# Altium PCB electrodes_interface_pcb.PcbDoc (part 1 of 4)
Units mm, origin at the board's own origin, x right, y up, seen from the top; angles counter-clockwise.
Board outline 433.27 x 43.31 mm, 4 copper layers (Top Layer, Signal Layer 1, Signal Layer 2, Bottom Layer), stack 1.308 mm thick; 42 components, 52 nets, 166 pads, 143 vias.
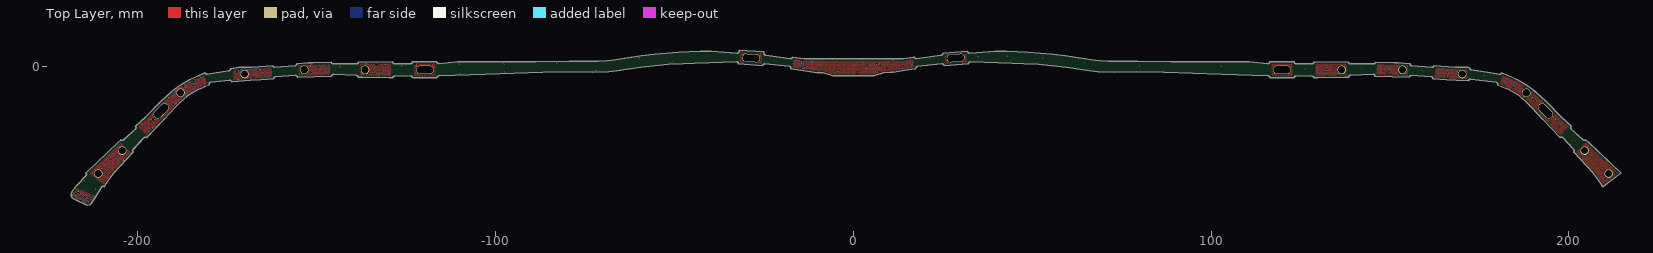
[diagram p0: Top Layer view]
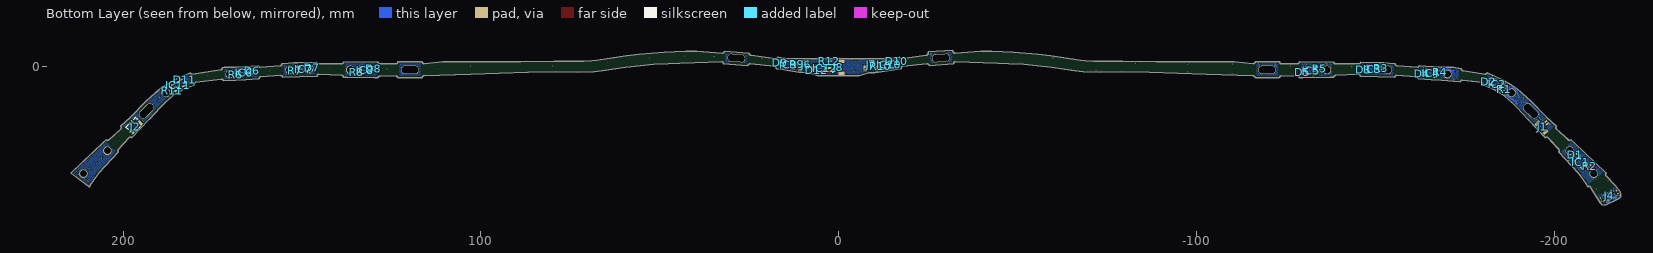
[diagram p1: Bottom Layer view, seen from below]
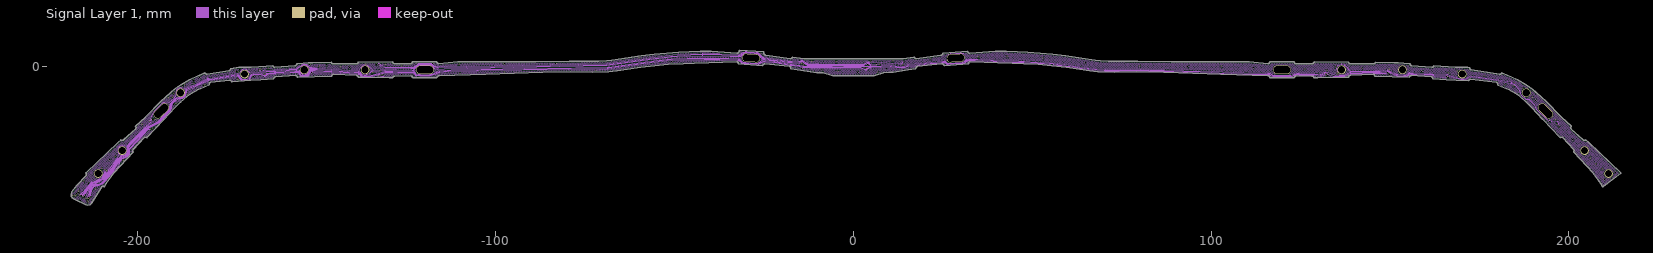
[diagram p2: Signal Layer 1]
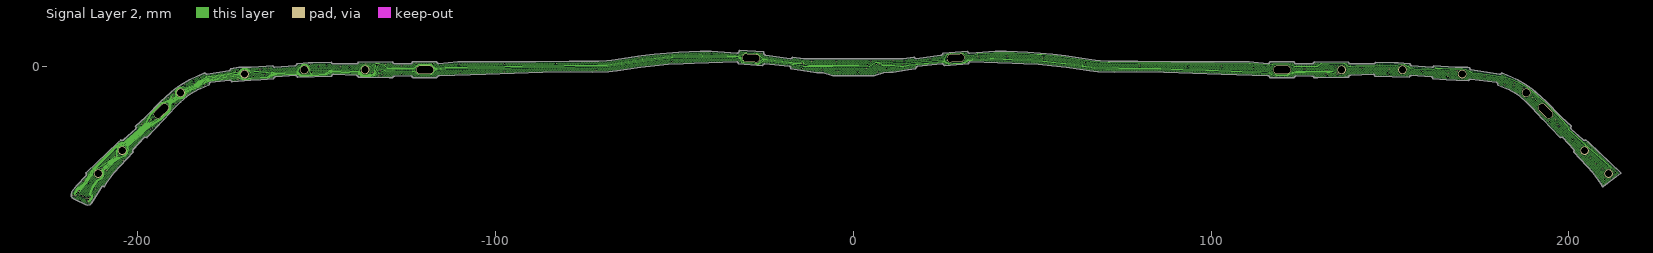
[diagram p3: Signal Layer 2]
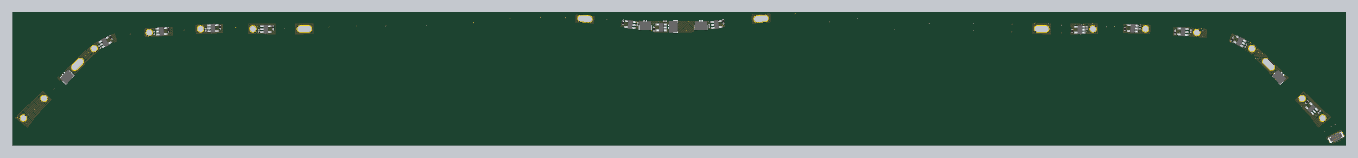
[diagram p7: 3D render of the assembled board from below, using the file's embedded part models]

## Layer stack, top to bottom
Top Solder: solder mask 0.0125, FC-001, Dk 4
Top Solder: solder mask 0.0102, Solder Resist, Dk 3.5
Top Layer: signal copper 0.0356
Dielectric 1: core 0.254, FR-4, Dk 4.2
Adhesive 3: prepreg 0.015, PP-006, Dk 4.1
Signal Layer 1: signal copper 0.0356
Adhesive 1: prepreg 0.013, PP-006, Dk 4.1
Polyimide: core 0.025, Core-009, Dk 4.5
Adhesive 2: prepreg 0.013, PP-006, Dk 4.1
Stiffener 2: core 0.213, Core-009, Dk 4.5
Stiffener 1: core 0.213, Core-009, Dk 4.5
Signal Layer 2: signal copper 0.0356
Adhesive 4: prepreg 0.015, PP-006, Dk 4.1
Dielectric 2: core 0.254, Dk 4.2
Bottom Layer: signal copper 0.0356
Bottom Coverlay: solder mask 0.0102, Solder Resist, Dk 3.5
Bottom Coverlay: solder mask 0.0125, FC-001, Dk 4
Stiffener 3: core 0.1504, Core-009, Dk 4.5

## Board outline
424 vertices, not listed, extent -218.704,-38.633 214.568,4.678
board region "Layer Stack Region 18": 17.469,-0.445 17.467,-0.42 17.467,-0.369 17.471,-0.319 17.479,-0.269 17.485,-0.245 17.08,2.59 17.067,2.61 17.044,2.651 17.025,2.693 17.009,2.737 17.002,2.76 13.87,2.244 -13.87,2.244 -17.002,2.76 -17.009,2.737 -17.025,2.693 -17.044,2.651 -17.067,2.61 -17.08,2.59 -17.485,-0.245 -17.481,-0.262 -17.474,-0.298 -17.469,-0.333 -17.467,-0.369 -17.466,-0.387 -17.469,-0.445 -13.825,-1.032 -10.171,-1.574 -10.12,-1.581 -8.483,-1.574 -8.447,-1.581 -6.199,-2.347 -5.753,-2.421 5.753,-2.421 6.199,-2.347 8.447,-1.581 8.483,-1.574 10.216,-1.54 11.106,-1.456 15.259,-0.745
board region "Layer Stack Region 31": 188.103,-9.811 189.664,-11.36 192.743,-14.647 197.551,-19.758 197.572,-19.739 197.616,-19.704 197.663,-19.674 197.713,-19.648 197.739,-19.637 200.551,-16.849 200.563,-16.815 200.595,-16.749 200.634,-16.688 200.682,-16.633 200.708,-16.608 197.915,-14.036 197.912,-14.033 193.441,-9.438 193.439,-9.435 192.498,-8.611 190.777,-7.102 189.924,-6.317 187.999,-4.969 187.996,-4.966 185.6,-3.569 185.228,-3.37 181.536,-1.749 181.531,-1.747 181.267,-1.686 181.255,-1.71 181.23,-1.755 181.2,-1.798 181.167,-1.838 181.148,-1.856 180.135,-4.827 180.135,-4.849 180.135,-4.874 180.13,-4.923 180.121,-4.971 180.108,-5.019 180.1,-5.042 181.346,-5.604 183.387,-6.426 183.406,-6.435 185.064,-7.382 185.075,-7.389 186.298,-8.23 186.313,-8.241
board region "Layer Stack Region 4": -189.656,-11.352 -188.104,-9.811 -186.313,-8.241 -186.298,-8.23 -185.075,-7.389 -185.064,-7.382 -183.406,-6.435 -183.387,-6.426 -181.346,-5.604 -180.1,-5.042 -180.109,-5.016 -180.123,-4.963 -180.132,-4.909 -180.135,-4.854 -180.135,-4.827 -181.148,-1.856 -181.167,-1.838 -181.2,-1.798 -181.23,-1.755 -181.255,-1.71 -181.267,-1.686 -181.531,-1.747 -181.536,-1.749 -185.228,-3.37 -185.6,-3.569 -187.996,-4.966 -187.999,-4.969 -189.924,-6.317 -190.777,-7.102 -192.467,-8.583 -193.439,-9.435 -193.441,-9.438 -197.912,-14.033 -197.915,-14.036 -200.708,-16.608 -200.682,-16.633 -200.634,-16.688 -200.595,-16.749 -200.563,-16.815 -200.551,-16.849 -197.739,-19.637 -197.713,-19.648 -197.663,-19.674 -197.616,-19.704 -197.572,-19.739 -197.551,-19.758 -192.743,-14.647
board region "Layer Stack Region 2": -206.733,-29.586 -201.349,-23.764 -201.361,-23.748 -201.383,-23.715 -201.402,-23.681 -201.42,-23.646 -201.427,-23.627 -204.596,-20.519 -204.622,-20.508 -204.672,-20.481 -204.72,-20.449 -204.763,-20.413 -204.784,-20.393 -205.566,-21.088 -214.568,-29.63 -214.551,-29.647 -214.518,-29.682 -214.489,-29.719 -214.464,-29.759 -214.452,-29.78 -209.701,-33.389 -209.667,-33.397 -209.601,-33.42 -209.538,-33.451 -209.479,-33.49 -209.452,-33.512 -208.946,-32.629 -208.937,-32.616 -206.744,-29.6
board region "Default Layer Stack Region": 208.946,-32.629 209.452,-33.512 209.479,-33.49 209.538,-33.451 209.601,-33.42 209.667,-33.397 209.701,-33.389 214.452,-29.78 214.464,-29.759 214.489,-29.719 214.518,-29.682 214.551,-29.647 214.568,-29.63 205.566,-21.088 204.784,-20.393 204.763,-20.413 204.72,-20.449 204.672,-20.481 204.622,-20.508 204.596,-20.519 201.427,-23.627 201.42,-23.646 201.402,-23.681 201.383,-23.715 201.361,-23.748 201.349,-23.764 206.733,-29.586 206.744,-29.6 208.937,-32.616
board region "Layer Stack Region 8": -165.703,-3.595 -162.006,-3.304 -162.008,-3.273 -162.007,-3.21 -161.998,-3.148 -161.983,-3.087 -161.973,-3.057 -162.222,0.167 -162.235,0.19 -162.257,0.236 -162.275,0.284 -162.288,0.333 -162.292,0.358 -164.17,0.225 -164.172,0.225 -168.321,-0.025 -168.324,-0.025 -171.768,-0.15 -174.001,-0.445 -173.743,-4.179 -168.554,-3.75
board region "Layer Stack Region 12": -138.474,-2.669 -138.464,-2.691 -138.446,-2.736 -138.433,-2.782 -138.424,-2.829 -138.421,-2.853 -137.374,-2.925 -137.372,-2.925 -129.775,-3.025 -128.767,-3.001 -128.763,-2.983 -128.755,-2.949 -128.745,-2.915 -128.733,-2.882 -128.726,-2.866 -128.752,1.222 -128.761,1.243 -128.777,1.286 -128.79,1.331 -128.799,1.376 -128.802,1.399 -138.393,1.375 -138.396,1.348 -138.404,1.294 -138.418,1.241 -138.437,1.19 -138.449,1.165
board region "Layer Stack Region 22": 138.421,-2.853 138.424,-2.829 138.433,-2.782 138.446,-2.736 138.464,-2.691 138.473,-2.669 138.474,-2.669 138.449,1.165 138.437,1.19 138.418,1.241 138.404,1.294 138.396,1.348 138.393,1.375 128.802,1.399 128.799,1.376 128.79,1.331 128.777,1.286 128.761,1.243 128.752,1.222 128.726,-2.866 128.733,-2.882 128.745,-2.915 128.755,-2.949 128.763,-2.983 128.767,-3.001 129.775,-3.025 137.372,-2.925 137.374,-2.925
board region "Layer Stack Region 10": -155.66,0.712 -155.471,-2.688 -155.46,-2.713 -155.44,-2.765 -155.425,-2.818 -155.415,-2.872 -155.413,-2.9 -145.814,-2.59 -145.814,-2.563 -145.809,-2.509 -145.799,-2.455 -145.783,-2.402 -145.774,-2.377 -145.869,1.132 -145.878,1.152 -145.895,1.192 -145.909,1.234 -145.919,1.277 -145.923,1.298 -151.148,1.15 -151.149,1.15 -152.372,1.125 -152.374,1.125 -155.371,0.95 -155.642,0.927 -155.638,0.866 -155.639,0.846 -155.642,0.807 -155.647,0.769 -155.655,0.731
board region "Layer Stack Region 26": 145.814,-2.59 155.413,-2.9 155.415,-2.872 155.425,-2.818 155.44,-2.765 155.46,-2.713 155.471,-2.688 155.66,0.712 155.653,0.738 155.643,0.792 155.639,0.846 155.64,0.9 155.642,0.927 155.37,0.95 152.374,1.125 152.372,1.125 151.149,1.15 151.148,1.15 145.923,1.298 145.919,1.277 145.909,1.234 145.895,1.192 145.878,1.152 145.869,1.132 145.774,-2.377 145.783,-2.402 145.798,-2.453 145.809,-2.505 145.814,-2.558 145.814,-2.585
board region "Layer Stack Region 27": 172.048,-3.709 172.283,-0.438 172.273,-0.41 172.257,-0.351 172.248,-0.292 172.246,-0.232 172.247,-0.202 171.768,-0.15 168.324,-0.025 168.321,-0.025 164.172,0.225 164.17,0.225 162.292,0.358 162.288,0.333 162.275,0.284 162.257,0.236 162.235,0.19 162.222,0.167 161.973,-3.057 161.981,-3.081 161.994,-3.129 162.003,-3.178 162.008,-3.227 162.008,-3.252 162.009,-3.252 162.006,-3.304 165.703,-3.595 168.554,-3.75 171.987,-3.903 171.991,-3.878 172.001,-3.828 172.017,-3.779 172.036,-3.732
board region "Layer Stack Region 23": 123.249,-2.999 123.252,-2.975 123.26,-2.926 123.273,-2.879 123.29,-2.833 123.3,-2.81 123.3,1.208 123.291,1.23 123.276,1.275 123.265,1.32 123.258,1.367 123.255,1.39 116.452,1.424 116.449,1.402 116.439,1.358 116.426,1.314 116.41,1.272 116.4,1.252 116.4,-2.819 116.408,-2.837 116.422,-2.874 116.432,-2.913 116.441,-2.951 116.444,-2.971
board region "Layer Stack Region 14": -123.249,-2.999 -116.444,-2.971 -116.441,-2.951 -116.432,-2.913 -116.422,-2.874 -116.408,-2.837 -116.4,-2.819 -116.4,1.252 -116.41,1.272 -116.426,1.314 -116.439,1.358 -116.449,1.402 -116.452,1.424 -123.255,1.39 -123.258,1.367 -123.265,1.32 -123.276,1.275 -123.291,1.23 -123.3,1.208 -123.3,-2.81 -123.29,-2.833 -123.273,-2.879 -123.26,-2.926 -123.252,-2.975
board region "Layer Stack Region 16": -32.177,0.897 -25.342,0.385 -25.338,0.408 -25.327,0.455 -25.312,0.5 -25.294,0.544 -25.283,0.565 -24.997,3.651 -25.014,3.717 -25.039,3.85 -25.054,3.984 -25.058,4.12 -25.056,4.188 -31.898,4.678 -31.905,4.604 -31.929,4.458 -31.968,4.316 -32.021,4.177 -32.052,4.11 -32.208,1.167 -32.2,1.143 -32.186,1.095 -32.177,1.046 -32.173,0.996 -32.172,0.971
board region "Layer Stack Region 20": 24.997,3.651 25.283,0.565 25.294,0.544 25.312,0.5 25.327,0.455 25.338,0.408 25.342,0.385 32.177,0.897 32.174,0.931 32.173,1 32.181,1.068 32.197,1.134 32.208,1.167 32.052,4.11 32.04,4.135 32.019,4.187 32.004,4.24 31.994,4.295 31.991,4.323 25.027,3.825 25.026,3.803 25.022,3.759 25.015,3.715 25.004,3.672
board region "Layer Stack Region 1": -212.884,-37.975 -212.876,-37.965 -211.561,-35.8 -217.044,-33.057 -217.045,-33.058 -218.554,-34.999 -218.563,-35.018 -218.704,-35.602 -218.704,-35.622 -218.611,-36.207 -218.604,-36.226 -218.413,-36.532 -217.788,-36.97 -217.764,-36.975 -214.495,-38.522 -214.49,-38.523 -214.047,-38.633 -213.465,-38.526 -213.44,-38.513
board region "Layer Stack Region 21": 102.777,-2.098 115.841,-2.498 115.927,-2.496 116.095,-2.531 116.243,-2.617 116.359,-2.744 116.4,-2.819 116.4,1.252 116.36,1.183 116.253,1.067 116.117,0.986 115.964,0.947 115.884,0.945 115.882,0.945 110.622,1.425 88.925,1.5 88.892,1.512 79.425,1.55 79.424,1.55 71.201,1.625 71.196,1.625 69.003,1.724 68.988,1.726 67.593,1.925 67.592,1.925 63.842,2.475 59.294,3.175 59.292,3.175 55.696,3.575 55.694,3.575 48.798,4.15 48.796,4.15 45.848,4.275 42.749,4.375 42.748,4.375 39.728,4.45 32.545,3.815 32.541,3.814 32.466,3.819 32.322,3.86 32.194,3.937 32.091,4.046 32.052,4.11 32.208,1.167 32.236,1.228 32.313,1.338 32.414,1.427 32.534,1.488 32.598,1.507 32.612,1.508 40.404,1.2 44.451,1.075 44.453,1.075 47.576,0.95 47.579,0.95 51.726,0.7 51.732,0.7 55.504,0.35 55.506,0.35 59.478,-0.05 59.485,-0.051 63.256,-0.625 63.26,-0.626 66.105,-1.125 66.109,-1.125 68.377,-1.35 68.38,-1.35 72.899,-1.475 72.902,-1.475 79.219,-1.369 79.221,-1.369 86.85,-1.494 86.87,-1.498
board region "Layer Stack Region 15": -32.612,1.508 -32.598,1.507 -32.534,1.488 -32.414,1.427 -32.313,1.338 -32.236,1.228 -32.208,1.167 -32.052,4.11 -32.091,4.046 -32.194,3.937 -32.322,3.86 -32.466,3.819 -32.541,3.814 -32.545,3.815 -39.728,4.45 -42.748,4.375 -42.749,4.375 -45.848,4.275 -48.796,4.15 -48.798,4.15 -55.694,3.575 -55.696,3.575 -59.292,3.175 -59.294,3.175 -63.842,2.475 -67.592,1.925 -67.593,1.925 -68.988,1.726 -69.003,1.724 -71.196,1.625 -71.201,1.625 -79.424,1.55 -79.425,1.55 -88.892,1.512 -88.925,1.5 -110.622,1.425 -115.882,0.945 -115.884,0.945 -115.964,0.947 -116.117,0.986 -116.253,1.067 -116.36,1.183 -116.4,1.252 -116.4,-2.819 -116.359,-2.744 -116.243,-2.617 -116.095,-2.531 -115.927,-2.496 -115.841,-2.498 -102.777,-2.098 -86.87,-1.498 -86.85,-1.494 -79.221,-1.369 -79.219,-1.369 -72.902,-1.475 -72.899,-1.475 -68.38,-1.35 -68.377,-1.35 -66.109,-1.125 -66.105,-1.125 -63.26,-0.626 -63.256,-0.625 -59.485,-0.051 -59.478,-0.05 -55.506,0.35 -55.504,0.35 -51.732,0.7 -51.726,0.7 -47.579,0.95 -47.576,0.95 -44.453,1.075 -44.451,1.075 -40.404,1.2
board region "Layer Stack Region 11": -145.284,-2.035 -138.96,-2.358 -138.884,-2.365 -138.739,-2.408 -138.612,-2.49 -138.511,-2.603 -138.474,-2.669 -138.449,1.165 -138.487,1.099 -138.59,0.985 -138.72,0.905 -138.867,0.863 -138.943,0.857 -145.359,0.834 -145.436,0.837 -145.587,0.874 -145.721,0.953 -145.828,1.065 -145.869,1.132 -145.774,-2.377 -145.739,-2.307 -145.642,-2.185 -145.514,-2.095 -145.366,-2.044 -145.289,-2.035
board region "Layer Stack Region 24": 145.289,-2.035 145.366,-2.044 145.514,-2.095 145.642,-2.185 145.739,-2.307 145.774,-2.377 145.869,1.132 145.828,1.065 145.721,0.953 145.587,0.874 145.436,0.837 145.359,0.834 138.943,0.857 138.867,0.863 138.72,0.905 138.59,0.985 138.487,1.099 138.449,1.165 138.473,-2.669 138.511,-2.603 138.612,-2.49 138.739,-2.408 138.884,-2.365 138.96,-2.358 145.284,-2.035
board region "Layer Stack Region 29": 179.725,-4.317 179.732,-4.319 179.813,-4.348 179.957,-4.444 180.064,-4.579 180.124,-4.741 180.135,-4.827 181.148,-1.856 181.092,-1.904 180.964,-1.976 180.821,-2.01 180.674,-2.006 180.602,-1.989 172.713,-0.783 172.712,-0.783 172.642,-0.767 172.51,-0.71 172.398,-0.619 172.313,-0.503 172.283,-0.438 172.048,-3.709 172.086,-3.646 172.187,-3.539 172.312,-3.462 172.453,-3.421 172.526,-3.415 172.533,-3.416
board region "Layer Stack Region 35": -209.812,-33.378 -209.798,-33.378 -209.77,-33.379 -209.743,-33.382 -209.715,-33.386 -209.701,-33.389 -214.452,-29.78 -214.437,-29.81 -214.413,-29.872 -214.397,-29.937 -214.389,-30.004 -214.388,-30.037 -214.39,-30.082 -214.405,-30.172 -214.435,-30.258 -214.478,-30.338 -214.504,-30.375 -214.534,-30.393 -217.044,-33.057 -212.659,-35.251 -211.561,-35.8 -210.175,-33.519 -210.144,-33.489 -210.107,-33.464 -210.029,-33.422 -209.944,-33.394 -209.857,-33.379
board region "Layer Stack Region 3": -198.275,-19.718 -198.269,-19.712 -198.21,-19.674 -198.082,-19.62 -197.944,-19.601 -197.806,-19.617 -197.739,-19.637 -200.551,-16.849 -200.545,-16.87 -200.535,-16.912 -200.528,-16.954 -200.524,-16.997 -200.524,-17.019 -200.526,-17.064 -200.541,-17.154 -200.57,-17.24 -200.613,-17.32 -200.64,-17.357 -200.646,-17.363 -203.976,-20.374 -204.037,-20.433 -204.182,-20.52 -204.347,-20.558 -204.515,-20.545 -204.596,-20.519 -201.427,-23.627 -201.452,-23.549 -201.465,-23.385 -201.428,-23.224 -201.346,-23.082 -201.29,-23.021
board region "Layer Stack Region 33": 198.275,-19.718 201.29,-23.021 201.33,-23.062 201.395,-23.154 201.44,-23.257 201.463,-23.368 201.466,-23.424 201.465,-23.45 201.461,-23.502 201.451,-23.553 201.436,-23.603 201.427,-23.627 204.596,-20.519 204.515,-20.545 204.347,-20.558 204.182,-20.52 204.037,-20.433 203.976,-20.374 200.646,-17.363 200.64,-17.357 200.602,-17.302 200.548,-17.179 200.525,-17.047 200.534,-16.914 200.551,-16.849 197.739,-19.637 197.806,-19.617 197.944,-19.601 198.082,-19.62 198.21,-19.674 198.269,-19.712
board region "Layer Stack Region 25": 128.224,-2.54 128.302,-2.546 128.454,-2.591 128.586,-2.677 128.689,-2.796 128.726,-2.866 128.752,1.222 128.712,1.152 128.605,1.033 128.468,0.951 128.314,0.911 128.234,0.908 123.805,0.878 123.726,0.884 123.573,0.929 123.44,1.016 123.337,1.138 123.3,1.208 123.3,-2.81 123.337,-2.743 123.438,-2.628 123.567,-2.545 123.713,-2.501 123.789,-2.495 123.791,-2.495 128.166,-2.543 128.173,-2.542 128.187,-2.541 128.202,-2.541 128.216,-2.54
board region "Layer Stack Region 13": -123.791,-2.495 -123.789,-2.495 -123.713,-2.501 -123.567,-2.545 -123.438,-2.628 -123.337,-2.743 -123.3,-2.81 -123.3,1.208 -123.337,1.138 -123.44,1.016 -123.573,0.929 -123.726,0.884 -123.805,0.878 -128.234,0.908 -128.314,0.911 -128.468,0.951 -128.605,1.033 -128.712,1.152 -128.752,1.222 -128.726,-2.866 -128.685,-2.79 -128.57,-2.663 -128.42,-2.577 -128.252,-2.541 -128.166,-2.543
board region "Layer Stack Region 19": 17.899,0.15 24.736,0.854 24.818,0.857 24.979,0.826 25.123,0.75 25.239,0.634 25.283,0.565 24.997,3.651 24.962,3.571 24.857,3.432 24.714,3.333 24.546,3.283 24.459,3.279 17.603,2.355 17.602,2.354 17.527,2.35 17.378,2.373 17.242,2.435 17.127,2.531 17.08,2.59 17.485,-0.245 17.509,-0.175 17.584,-0.047 17.691,0.057 17.821,0.127 17.892,0.149
board region "Layer Stack Region 17": -17.899,0.15 -17.892,0.149 -17.821,0.127 -17.691,0.057 -17.584,-0.047 -17.509,-0.175 -17.485,-0.245 -17.08,2.59 -17.127,2.531 -17.242,2.435 -17.378,2.373 -17.527,2.35 -17.602,2.354 -17.603,2.355 -24.459,3.279 -24.546,3.283 -24.714,3.333 -24.857,3.432 -24.962,3.571 -24.997,3.651 -25.283,0.565 -25.239,0.634 -25.123,0.75 -24.979,0.826 -24.818,0.857 -24.736,0.854
board region "Layer Stack Region 9": -155.957,-2.388 -155.954,-2.388 -155.879,-2.394 -155.737,-2.436 -155.61,-2.515 -155.51,-2.624 -155.471,-2.688 -155.66,0.712 -155.687,0.639 -155.771,0.507 -155.888,0.405 -156.029,0.339 -156.105,0.322 -156.109,0.321 -161.726,-0.101 -161.728,-0.101 -161.802,-0.099 -161.945,-0.066 -162.074,0.004 -162.181,0.107 -162.222,0.167 -161.973,-3.057 -161.942,-2.989 -161.853,-2.869 -161.737,-2.777 -161.599,-2.72 -161.526,-2.706 -161.523,-2.706
board region "Layer Stack Region 30": 155.471,-2.688 155.51,-2.624 155.61,-2.515 155.737,-2.436 155.879,-2.394 155.954,-2.388 155.957,-2.388 161.523,-2.706 161.526,-2.706 161.599,-2.72 161.737,-2.777 161.853,-2.869 161.942,-2.989 161.973,-3.057 162.222,0.167 162.181,0.107 162.074,0.004 161.945,-0.066 161.802,-0.099 161.728,-0.101 161.726,-0.101 156.109,0.321 156.105,0.322 156.029,0.339 155.888,0.405 155.771,0.507 155.687,0.639 155.66,0.712
board region "Layer Stack Region 7": -179.725,-4.317 -174.412,-3.651 -174.303,-3.674 -174.097,-3.761 -173.922,-3.899 -173.79,-4.078 -173.743,-4.179 -174.001,-0.445 -174.036,-0.553 -174.147,-0.752 -174.306,-0.915 -174.501,-1.032 -174.609,-1.07 -180.602,-1.989 -180.674,-2.006 -180.821,-2.01 -180.964,-1.976 -181.092,-1.904 -181.148,-1.856 -180.135,-4.827 -180.124,-4.741 -180.064,-4.579 -179.957,-4.444 -179.813,-4.348 -179.732,-4.319

## Design rules (kind name [scope] priority, off if disabled: settings)
BoardOutlineClearance [OnLayer('Bottom Layer')] p1: gap=0.41 ignorepadtopadclearanceinfootprint=FALSE except(0: Arc-SplitContinuation Poly-SplitContinuation; 0.2: Track-OutlineEdge Track-CutoutEdge SMDPad-OutlineEdge SMDPad-CutoutEdge THPad-OutlineEdge THPad-CutoutEdge Via-OutlineEdge Via-CutoutEdge)
BoardOutlineClearance BoardOutlineClearance_2 [OnLayer('Top Layer')] p2: gap=0.41 ignorepadtopadclearanceinfootprint=FALSE except(0: Arc-SplitContinuation Poly-SplitContinuation; 0.2: Arc-OutlineEdge Arc-CutoutEdge Track-OutlineEdge Track-CutoutEdge SMDPad-OutlineEdge SMDPad-CutoutEdge THPad-OutlineEdge THPad-CutoutEdge Via-OutlineEdge Via-CutoutEdge)
BoardOutlineClearance BoardOutlineClearance_1 [All] p3: gap=0.2 ignorepadtopadclearanceinfootprint=FALSE except(0: Arc-SplitContinuation Track-SplitContinuation Poly-SplitContinuation)
Clearance [All] p1: gap=0.075 ignorepadtopadclearanceinfootprint=FALSE
ComponentClearance [All] p1: gap=0.1 collisioncheckmode=3 verticalgap=0.254 showdistances=FALSE
DiffPairsRouting [All] p1: maxlimit=0.254 minlimit=0.254 mostfreqgap=0.254 toplayer_minwidth=0.381 toplayer_maxwidth=0.381 toplayer_prefwidth=0.381 midlayer1_minwidth=0.381 midlayer1_maxwidth=0.381 midlayer1_prefwidth=0.381 midlayer2_minwidth=0.381 midlayer2_maxwidth=0.381 midlayer2_prefwidth=0.381 bottomlayer_minwidth=0.381 bottomlayer_maxwidth=0.381 bottomlayer_prefwidth=0.381 substack1={2ACF0EFB-B757-4DC5-973B-DD2F7F80F3FB} toplayer_{2acf0efb-b757-4dc5-973b-dd2f7f80f3fb}_minwidth=0.381 toplayer_{2acf0efb-b757-4dc5-973b-dd2f7f80f3fb}_maxwidth=0.381 toplayer_{2acf0efb-b757-4dc5-973b-dd2f7f80f3fb}_prefwidth=0.381 midlayer1_{2acf0efb-b757-4dc5-973b-dd2f7f80f3fb}_minwidth=0.381 midlayer1_{2acf0efb-b757-4dc5-973b-dd2f7f80f3fb}_maxwidth=0.381 midlayer1_{2acf0efb-b757-4dc5-973b-dd2f7f80f3fb}_prefwidth=0.381 midlayer2_{2acf0efb-b757-4dc5-973b-dd2f7f80f3fb}_minwidth=0.381 midlayer2_{2acf0efb-b757-4dc5-973b-dd2f7f80f3fb}_maxwidth=0.381 midlayer2_{2acf0efb-b757-4dc5-973b-dd2f7f80f3fb}_prefwidth=0.381 bottomlayer_{2acf0efb-b757-4dc5-973b-dd2f7f80f3fb}_minwidth=0.381 bottomlayer_{2acf0efb-b757-4dc5-973b-dd2f7f80f3fb}_maxwidth=0.381 bottomlayer_{2acf0efb-b757-4dc5-973b-dd2f7f80f3fb}_prefwidth=0.381 maxuncoupledlength=12.7
MinimumAnnularRing [All] p1: minimumring=0.15
MinimumSolderMaskSliver [All] p1: minsoldermaskwidth=0.1
PolygonConnect [All] p1: connectstyle=Relief reliefconductorwidth=0.254 reliefentries=4 polygonreliefangle="90 Angle" airgapwidth=0.254
RoutingVias [All] p1: holewidth=0.2 width=0.4 viastyle="Through Hole" minholewidth=0.2 minwidth=0.4 maxholewidth=0.2 maxwidth=0.4
SilkToSilkClearance [All] p1: silktosilkclearance=0.1
SilkToSolderMaskClearance [IsPad] p1: minsilkscreentomaskgap=0.1 clearancetoexposedcopper=TRUE
SolderMaskExpansion [All] p1: expansion=0.05 istentingtop=FALSE
Width [All] p1: maxlimit=25 minlimit=0.075 preferedwidth=0.075 substack1={2ACF0EFB-B757-4DC5-973B-DD2F7F80F3FB} toplayer_{2acf0efb-b757-4dc5-973b-dd2f7f80f3fb}_minwidth=0.1 toplayer_{2acf0efb-b757-4dc5-973b-dd2f7f80f3fb}_prefwidth=0.1 midlayer1_{2acf0efb-b757-4dc5-973b-dd2f7f80f3fb}_minwidth=0.1 midlayer1_{2acf0efb-b757-4dc5-973b-dd2f7f80f3fb}_prefwidth=0.1 midlayer2_{2acf0efb-b757-4dc5-973b-dd2f7f80f3fb}_minwidth=0.1 midlayer2_{2acf0efb-b757-4dc5-973b-dd2f7f80f3fb}_prefwidth=0.1 bottomlayer_{2acf0efb-b757-4dc5-973b-dd2f7f80f3fb}_minwidth=0.1 bottomlayer_{2acf0efb-b757-4dc5-973b-dd2f7f80f3fb}_prefwidth=0.1
25 further rules are at their usual default settings.

## Components (designator, comment, footprint, x,y, rotation, side; value= is the part's Value field where it differs from the comment)
D1 "RB530CM-30T2R" RB886CST2RA -206,-24.575 r45 bottom
D2 "RB530CM-30T2R" RB886CST2RA -181.7,-4.175 r208 bottom
D3 "RB530CM-30T2R" RB886CST2RA -146.85,-0.825 r183 bottom
D4 "RB530CM-30T2R" RB886CST2RA -163.125,-1.925 r184 bottom
D5 "RB530CM-30T2R" RB886CST2RA -129.725,-1.5 r180 bottom
D6 "RB530CM-30T2R" RB886CST2RA 163.93,-1.011 r356 bottom
D7 "RB530CM-30T2R" RB886CST2RA 147.213,-0.169 r358 bottom
D8 "RB530CM-30T2R" RB886CST2RA 129.933,-0.439 r0 bottom
D9 "RB530CM-30T2R" RB886CST2RA 16.25,1.233 r187 bottom
D10 "RB530CM-30T2R" RB886CST2RA -16.301,1.622 r353 bottom
D11 "RB530CM-30T2R" RB886CST2RA 182.719,-3.563 r330 bottom
D12 "RB530CM-30T2R" RB886CST2RA 6.175,-0.875 r180 bottom
IC1 "AD8603AUJZ-R2" SOT95P280X100-5N -207.506,-26.687 r45 bottom
IC2 "AD8603AUJZ-R2" SOT95P280X100-5N -184.175,-4.875 r28 bottom
IC3 "AD8603AUJZ-R2" SOT95P280X100-5N -149.375,-0.625 r3 bottom
IC4 "AD8603AUJZ-R2" SOT95P280X100-5N -165.7,-1.725 r4 bottom
IC5 "AD8603AUJZ-R2" SOT95P280X100-5N -132.179,-1.051 r0 bottom
IC6 "AD8603AUJZ-R2" SOT95P280X100-5N 166.205,-1.593 r176 bottom
IC7 "AD8603AUJZ-R2" SOT95P280X100-5N 149.531,-0.581 r178 bottom
IC8 "AD8603AUJZ-R2" SOT95P280X100-5N 132.333,-0.898 r180 bottom
IC9 "AD8603AUJZ-R2" SOT95P280X100-5N 13.895,0.606 r7 bottom
IC10 "AD8603AUJZ-R2" SOT95P280X100-5N -14.1,0.625 r173 bottom
IC11 "AD8603AUJZ-R2" SOT95P280X100-5N 184.547,-5.143 r150 bottom
IC12 "AD8603AUJZ-R2" SOT95P280X100-5N 3.8,-0.325 r0 bottom
J1 "DF52-2S-0.8H_21_" DF522S08H21 -197.228,-16.241 r227 bottom
J2 "DF52-2S-0.8H_21_" DF522S08H21 197.15,-16.175 r134 bottom
J4 "505066-1622" FP-505066-1622-MFG -215.406,-36.04 r335 bottom
J6 "DF52-2S-0.8H_21_" DF522S08H21 9.044,0.616 r180 bottom
J7 "DF52-2S-0.8H_21_" DF522S08H21 -9.1,0.625 r180 bottom
J8 "DF52-2S-0.8H_21_" DF522S08H21 0.236,-0.09 r90 bottom
R1 "RC0402JR-0756KL" RESC1005X40X25LL05T10 -186.138,-6.275 r120 bottom
R2 "RC0402JR-0756KL" RESC1005X40X25LL05T10 -209.975,-27.75 r315 bottom
R3 "RC0402JR-0756KL" RESC1005X40X25LL05T10 -151.7,-0.325 r93 bottom
R4 "RC0402JR-0756KL" RESC1005X40X25LL05T10 -168.25,-1.55 r94 bottom
R5 "RC0402JR-0756KL" RESC1005X40X25LL05T10 -134.5,-0.475 r90 bottom
R6 "RC0402JR-0756KL" RESC1005X40X25LL05T10 168.557,-2.165 r266 bottom
R7 "RC0402JR-0756KL" RESC1005X40X25LL05T10 151.85,-1.085 r268 bottom
R8 "RC0402JR-0756KL" RESC1005X40X25LL05T10 134.638,-1.416 r270 bottom
R9 "RC0402JR-0756KL" RESC1005X40X25LL05T10 11.544,0.792 r97 bottom
R10 "RC0402JR-0756KL" RESC1005X40X25LL05T10 -11.775,0.15 r263 bottom
R11 "RC0402JR-0756KL" RESC1005X40X25LL05T10 186.307,-6.719 r240 bottom
R12 "RC0402JR-0756KL" RESC1005X40X25LL05T10 2.575,1.625 r0 bottom

## Footprints (in the part's own frame and the unit in brackets; to place one, negate y for a bottom-side part, rotate by r counter-clockwise, add the part's x,y. Pads: shape width x height; smd on the part's side, far side on the other; paste and mask are expansions set on the pad)
DF522S08H21 [mm]
  rect 0.5x1 smd: 1(-0.4,0.89) 2(0.4,0.89)
  rect 0.9x1.6 smd: 3(-1.65,-1.03) 4(1.65,-1.03)
  body extent -2.01,-1.74 2.01,1.34, height 1.1
FP-505066-1622-MFG [mm]
  rect 0.18x0.4 smd paste-1000 mask+0: 1(-1.225,-0.95) 2(-1.225,0.95) 3(-0.875,-0.95) 4(-0.875,0.95) 5(-0.525,-0.95) 6(-0.525,0.95) 7(-0.175,-0.95) 8(-0.175,0.95) 9(0.175,-0.95) 10(0.175,0.95) 11(0.525,-0.95) 12(0.525,0.95) 13(0.875,-0.95) 14(0.875,0.95) 15(1.225,-0.95) 16(1.225,0.95)
  rect 0.4x0.385 smd paste-1000 mask+0: 17(-2.505,0.483) 18(2.505,0.483) 19(-2.505,-0.483) 20(2.505,-0.483)
  body extent -2.63,-1 2.62,1, height 0.63
RB886CST2RA [mm]
  rect 0.55x0.45 smd: 1(0,0.475) 2(0,-0.475)
  silkscreen extent -0.05,0.85 0.05,0.95, body extent -0.3,-0.53 0.3,0.53, height 0.4
RESC1005X40X25LL05T10 [mm] "Chip Resistor, 2-Leads, Body 1.00x0.50mm, IPC High Density"
  rect 0.5x0.45 smd: 1(-0.375,0) 2(0.375,0)
  body extent -0.53,-0.27 0.52,0.28, height 0.4
SOT95P280X100-5N [mm]
  rect 1.15x0.6 smd: 1(-1.25,0.95) 2(-1.25,0) 3(-1.25,-0.95) 4(1.25,-0.95) 5(1.25,0.95)
  body extent -1.4,-1.45 1.4,1.45, height 1

## Part data
D1 D2 D3 D4 D5 D6 D7 D8 D9 D10 D11 D12: "Schottky Diode", Manufacturer_Name="ROHM Semiconductor", Mouser Part Number=755-RB530CM-30T2R, Datasheet Link=https://fscdn.rohm.com/en/products/databook/datasheet/discrete/diode/schottky_barrier/rb530cm-30t2r-e.pdf, Height=0.4mm, Manufacturer_Part_Number=RB530CM-30T2R, Mouser Price/Stock=https://www.mouser.co.uk/ProductDetail/ROHM-Semiconductor/RB530CM-30T2R?qs=4v%252BiZTmLVHEj8J7gVIxl2g%3D%3D
IC1 IC2 IC3 IC4 IC5 IC6 IC7 IC8 IC9 IC10 IC11 IC12: "Integrated Circuit", Manufacturer_Name="Analog Devices", Datasheet Link=http://componentsearchengine.com/Datasheets/3/AD8603AUJZ-R2.pdf, Height=1mm, Manufacturer_Part_Number=AD8603AUJZ-R2
J1 J2 J6 J7 J8: "Connector", Manufacturer_Name=Hirose, Manufacturer_Part_Number=DF52-2S-0.8H(21), Mouser Part Number=798-DF52-2S-0.8H21, Datasheet Link=https://datasheet.datasheetarchive.com/originals/distributors/DKDS-30/591726.pdf, Height=1mm, Mouser Price/Stock=https://www.mouser.co.uk/ProductDetail/Hirose-Connector/DF52-2S-0.8H21?qs=%2FKR40Cd6GUpAHUMGMtWbig%3D%3D
J4: library part CMP-04776-000161-1, "CONN RCPT 16POS SMD GOLD"
R1 R2 R3 R4 R5 R6 R7 R8 R9 R10 R11 R12: library part CMP-2002-08022-1, Manufacturer="Yageo / Phycomp", Resistance=56k, Part Number=RC0402JR-0756KL

## Free pads (board coordinates)
  round 2.4 hole 2: 1(-211.098,-29.801) 1(-204.398,-23.401) 1(-188.098,-7.201) 1(-170.198,-2.001) 1(-153.498,-0.801) 1(-136.498,-0.801) 1(136.498,-0.801) 1(153.498,-0.801) 1(170.198,-2.001) 1(188.098,-7.201) 1(204.398,-23.401) 1(211.098,-29.801)
  oval 5x2.4 hole 2 slot 4.6 at 45 deg rot 45: 1(-193.498,-12.301)
  oval 5x2.4 hole 2 slot 4.6 at 0 deg: 1(-119.798,-0.801) 1(119.798,-0.801)
  oval 5x2.4 hole 2 slot 4.6 at 175.5 deg rot 175.5: 1(-28.6,2.5)
  oval 5x2.4 hole 2 slot 4.6 at 4 deg rot 4: 1(28.6,2.5)
  oval 5x2.4 hole 2 slot 4.6 at 135 deg rot 135: 1(193.498,-12.301)

## Via types
v1: diameter 0.4, hole 0.2, Top Layer to Bottom Layer, tented both sides, 143 vias

## Nets (pads, with @x,y where several pads share a name; then routed paths per layer and width w, separated by ;. In a path a pad name is that pad's centre, name@x,y a point inside that pad or via, vN(x,y) a via of type N, cw(c..) or ccw(c..) an arc to the next point about the centre after c; other vN are vias at no path point)
ADC_EAR_L: J1.1 J4.15 | length 30
  Signal Layer 1 w0.1: v1(-213.334,-36.274) -213.068,-35.251 -212.791,-34.182 -212.52,-33.832 -212.166,-33.376 cw(c-212.087,-33.437) -212.109,-33.34 -211.929,-33.299 ccw(c-212.081,-32.616) -211.91,-33.295 -211.908,-33.294 -211.76,-33.257 ccw(c-211.981,-32.385) -211.722,-33.246 cw(c-211.692,-33.342) -211.714,-33.244 -211.307,-33.188 ccw(c-211.741,-29.999) -210.243,-32.848 ccw(c-211.741,-29.999) -209.5,-32.309 -209.132,-31.952 ccw(c-209.202,-31.882) -209.127,-31.947 -207.462,-30.029 -207.019,-29.545 -206.994,-29.519 -206.994,-29.497 ccw(c-207.066,-29.427) -206.983,-29.483 -206.913,-29.413 -205.285,-27.652 -205.281,-27.648 -205.06,-26.687 cw(c-204.962,-26.709) -205.036,-26.641 ; -205.039,-26.617 -204.692,-26.11 cw(c-204.609,-26.166) -204.686,-26.102 -204.362,-25.719 cw(c-204.286,-25.784) -204.328,-25.693 -204.046,-25.561 -204.011,-25.544 -203.983,-25.53 -203.714,-25.44 ccw(c-204.398,-23.401) -203.321,-25.262 -202.841,-24.984 -202.443,-24.502 ccw(c-202.751,-24.247) -202.355,-24.302 -202.27,-23.704 ccw(c-204.398,-23.401) -202.25,-23.322 cw(c-202.15,-23.318) -202.244,-23.284 -202.118,-22.937 -202.06,-22.779 -202.054,-22.76 -198.485,-18.915 -197.09,-17.412 -197.058,-17.38 -196.857,-17.38 -196.515,-17.38 v1(-196.507,-17.388)
  Bottom Layer w0.1: J4.15@-213.894,-35.697 -213.921,-35.849 v1(-213.334,-36.274) ; J1.1@-197.606,-15.341 -197.289,-15.661 -197.029,-15.904 ; -197.028,-15.904 ccw(c-196.96,-15.831) -197,-15.923 ; -196.999,-15.923 cw(c-197.039,-16.015) -196.944,-15.983 -196.944,-16.951 v1(-196.507,-17.388)
ADC_EAR_R: J2.1 J4.16 | length 447.8
  Signal Layer 1 w0.075: -155.337,-0.429 -154.213,0.299 cw(c-153.498,-0.801) -152.641,0.193 cw(c-153.498,-0.801) -152.628,0.181 -152.175,-0.219 ccw(c-152.026,-0.05) -152.168,-0.225 -151.995,-0.364 ccw(c-151.948,-0.306) -151.943,-0.38 -151.767,-0.368 -151.675,-0.361 ; -122.903,-0.844 -122.075,0.076 ccw(c-122.13,0.126) -122.074,0.077 cw(c-121.098,-0.801) -121.098,0.511 -118.498,0.511 cw(c-118.498,-0.801) -117.245,-0.413 ccw(c-117.161,-0.388) -117.184,-0.472 -116.4,-0.691
  Signal Layer 1 w0.1: v1(-166.146,-0.723) -165.844,-1.171 ; -165.844,-1.172 ccw(c-165.761,-1.115) -165.757,-1.215 -161.984,-1.029 -161.973,-1.028 -155.675,-0.639 -155.66,-0.63 -155.586,-0.586 ; -155.585,-0.585 -155.339,-0.439 ; -151.767,-0.376 cw(c-151.537,-1.574) -151.259,-0.387 -150.249,-0.407 -149.9,-0.405 cw(c-149.898,-0.64) -149.883,-0.405 -145.774,-0.658 -145.759,-0.659 -138.474,-1.061 -138.136,-1.079 -138.102,-1.075 -137.691,-0.225 cw(c-136.498,-0.801) -135.66,0.224 -135.606,0.18 ; -135.605,0.18 -134.265,-0.925 ccw(c-134.201,-0.848) -134.192,-0.948 -132.286,-0.776 cw(c-132.257,-1.099) -132.256,-0.774 -130.582,-0.777 ; -130.582,-0.766 -130.579,-0.766 -130.521,-0.767 -128.726,-0.8 -128.718,-0.8 -127.695,-0.818 -123.3,-0.898 -122.963,-0.904 -122.962,-0.903 -122.903,-0.844 ; -116.4,-0.691 -116.387,-0.692 ccw(c-116.379,-0.605) -116.379,-0.693 -116.375,-0.693 ccw(c-116.382,-0.593) -116.372,-0.692 -114.323,-0.489 -69.031,0.44 -68.96,0.442 -54.414,2.435 -52.872,2.611 -50.985,2.827 cw(c-50.925,2.305) -50.943,2.83 -42.207,3.129 cw(c-42.189,2.604) -42.177,3.129 -34.424,2.958 -31.516,2.939 ccw(c-31.515,3.039) -31.448,2.964 ; -31.416,2.965 -31.391,2.983 ccw(c-31.449,3.064) -31.378,2.994 -30.833,3.539 cw(c-29.896,2.602) -30.826,3.546 cw(c-29.896,2.602) -29.792,3.923 -28.706,3.837 -27.201,3.719 ; -27.2,3.719 cw(c-27.304,2.398) -26.102,2.957 cw(c-27.304,2.398) -26.023,2.736 ; -26.023,2.735 ccw(c-25.926,2.761) -25.982,2.678 -25.624,2.435 -25.619,2.431 -25.603,2.414 ; -25.603,2.413 ccw(c-25.528,2.48) -25.546,2.382 -25.283,2.334 -24.997,2.281 -24.666,2.221 -22.274,1.88 -22.268,1.879 ; -22.267,1.879 -18.331,1.253 ccw(c-18.315,1.351) -18.321,1.251 ; -18.32,1.251 -17.485,1.206 -17.08,1.184 -15.053,1.074 ccw(c-15.048,1.174) -14.99,1.093 -14.593,1.374 cw(c-14.391,1.089) -14.191,1.376 -12.917,0.492 ; -12.917,0.492 ccw(c-12.86,0.575) -12.86,0.475 -9.664,0.475 2.848,0.401 ccw(c2.848,0.501) 2.897,0.414 3.825,0.938 cw(c3.997,0.633) 4.235,0.89 4.755,0.408 4.912,0.424 ccw(c4.893,0.623) 4.915,0.424 6.494,0.603 ccw(c6.454,0.951) 6.5,0.604 v1(7.394,0.722) ; v1(135.469,-2.084) 135.827,-2.22 ccw(c135.862,-2.126) 135.849,-2.225 135.85,-2.226 ccw(c135.864,-2.127) 135.867,-2.227 ; 135.868,-2.227 137.334,-2.171 ; 137.335,-2.171 ccw(c137.331,-2.071) 137.373,-2.162 137.641,-2.035 138.473,-1.642 138.772,-1.502 142.58,-1.348 cw(c142.584,-1.448) 142.584,-1.348 143.919,-1.348 147.26,-1.29 148.633,-1.145 ; 148.634,-1.145 ccw(c148.623,-1.046) 148.639,-1.145 149.194,-1.051 cw(c149.211,-1.149) 149.226,-1.051 149.419,-1.08 cw(c149.337,-1.624) 149.647,-1.17 150.024,-1.427 151.614,-2.035 151.75,-2.087 151.77,-2.095 151.787,-2.111 151.936,-2.273 151.965,-2.302 152.004,-2.304 154.57,-2.42 154.601,-2.42 154.626,-2.405 155.215,-2.035 ; 155.215,-2.035 155.471,-1.874 155.508,-1.851 cw(c155.561,-1.935) 155.529,-1.841 155.66,-1.795 155.695,-1.783 cw(c155.728,-1.878) 155.716,-1.779 155.771,-1.772 cw(c155.807,-2.07) 155.841,-1.772 156.411,-1.836 156.522,-1.849 159.525,-2.035 161.939,-2.185 ccw(c161.944,-2.085) 161.94,-2.185 162.222,-2.195 165.832,-2.32 cw(c165.82,-2.67) 166.031,-2.39 cw(c165.82,-2.67) 166.044,-2.401 169.765,-3.49 ccw(c170.198,-2.001) 170.503,-3.521 170.972,-3.427 ccw(c170.952,-3.329) 170.984,-3.424 170.985,-3.424 ; 170.986,-3.423 172.048,-3.053 172.921,-2.748 172.944,-2.748 172.95,-2.749 175.19,-3.009 cw(c175.179,-3.108) 175.194,-3.009 179.86,-3.743 ; 179.86,-3.743 cw(c179.845,-3.841) 179.864,-3.743 180.997,-3.964 183.811,-4.513 183.838,-4.518 ccw(c183.979,-4.377) 183.893,-4.557 184.731,-4.958 cw(c184.58,-5.274) 184.828,-5.027 186.015,-6.22 cw(c185.944,-6.29) 186.039,-6.259 186.522,-7.721 ; 186.522,-7.721 ccw(c186.617,-7.689) 186.549,-7.763 ; 186.549,-7.763 187.928,-9.044 187.957,-9.071 188.905,-9.071 188.936,-9.102 190.29,-10.578 190.297,-10.593 190.776,-11.704 ; 190.777,-11.705 ccw(c190.868,-11.665) 190.798,-11.736 193.926,-14.773 ccw(c193.996,-14.702) 193.985,-14.801 194.585,-14.871 cw(c194.544,-15.219) 194.694,-14.903 195.11,-15.1 ; 195.135,-15.118 195.144,-15.123 ccw(c195.192,-15.035) 195.181,-15.134 196.768,-15.288 cw(c196.758,-15.387) 196.81,-15.302 cw(c196.76,-15.388) 196.849,-15.344 ; 196.85,-15.345 197.071,-15.82 cw(c196.754,-15.968) 197.086,-15.857 v1(197.325,-16.573)
  Signal Layer 2 w0.1: v1(-213.795,-37.039) -213.129,-36.557 ccw(c-213.334,-36.274) -213.188,-35.956 -213.562,-35.781 cw(c-213.52,-35.69) -213.613,-35.655 -213.487,-35.317 -213.481,-35.3 -213.463,-35.251 -213.46,-35.245 -212.825,-33.533 ; -212.825,-33.532 -212.768,-33.369 cw(c-212.579,-33.436) -212.743,-33.321 -211.854,-32.049 ccw(c-211.936,-31.992) -211.853,-32.047 -211.556,-31.603 cw(c-211.473,-31.659) -211.546,-31.591 -211.524,-31.567 cw(c-211.45,-31.635) -211.499,-31.547 -210.449,-30.956 ccw(c-211.098,-29.801) -210.071,-28.965 cw(c-209.992,-28.903) -210.087,-28.935 cw(c-209.992,-28.903) -210.08,-28.856 -209.635,-28.025 -209.621,-28.014 -207.744,-26.401 cw(c-207.614,-26.553) -207.735,-26.394 ; -207.735,-26.394 -206.54,-25.492 cw(c-206.48,-25.572) -206.533,-25.487 -206.137,-25.24 ccw(c-206.322,-24.943) -205.982,-24.861 -205.982,-24.859 -205.901,-23.375 cw(c-205.801,-23.38) -205.901,-23.373 -205.894,-23.288 cw(c-204.398,-23.401) -204.581,-21.913 -204.049,-21.847 ccw(c-204.096,-21.47) -203.957,-21.824 -203.435,-21.619 -203.181,-21.392 ccw(c-203.248,-21.317) -203.173,-21.384 -202.704,-20.859 -201.687,-19.96 -199.431,-17.968 -197.256,-16.047 cw(c-197.19,-16.121) -197.246,-16.039 -196.485,-15.516 ccw(c-196.684,-15.228) -196.369,-15.075 -196.663,-14.467 cw(c-196.573,-14.423) -196.667,-14.388 -196.248,-13.267 -195.399,-12.33 cw(c-194.417,-13.22) -195.355,-12.284 -193.515,-10.444 cw(c-192.579,-11.382) -192.698,-10.062 -192.175,-10.015 ccw(c-192.184,-9.915) -192.156,-10.011 -191.52,-9.819 ; -196.248,-13.267 cw(c-196.155,-13.302) -196.226,-13.232 ; -191.532,-9.812 ccw(c-191.553,-9.715) -191.491,-9.793 -191.301,-9.643 -189.436,-8.172 ccw(c-189.498,-8.094) -189.398,-8.088 ; -189.398,-8.088 -189.535,-7.634 cw(c-188.098,-7.201) -188.111,-5.701 -187.945,-5.7 cw(c-187.944,-5.8) -187.922,-5.703 -187.76,-5.74 cw(c-188.098,-7.201) -187.752,-5.742 -186.58,-6.02 ; -186.601,-6.013 ccw(c-186.579,-5.814) -186.507,-6.001 -185.634,-5.664 ccw(c-185.67,-5.571) -185.618,-5.656 cw(c-185.514,-5.827) -185.595,-5.644 -183.928,-4.908 ccw(c-184.15,-4.405) -183.911,-4.9 -183.909,-4.9 ccw(c-183.954,-4.81) -183.907,-4.898 -183.875,-4.881 ccw(c-183.921,-4.793) -183.871,-4.879 -183.676,-4.765 ccw(c-183.828,-4.506) -183.619,-4.721 -182.84,-3.969 -180.807,-2.913 ; -180.807,-2.913 cw(c-180.761,-3.001) -180.785,-2.904 cw(c-180.76,-3.001) -180.776,-2.902 -180.196,-2.809 -175.104,-1.989 -173.743,-1.77 -172.336,-1.543 ccw(c-172.352,-1.444) -172.295,-1.526 v1(-171.997,-1.316) ; v1(7.394,0.722) 8.124,0.42 ccw(c8.162,0.512) 8.16,0.412 11.492,0.317 ; 11.493,0.317 cw(c11.489,0.217) 11.502,0.316 13.568,0.005 14.024,0.005 15.484,0.437 17.485,0.631 18.476,0.727 19.783,0.854 20.745,0.947 20.747,0.947 24.997,1.374 25.474,1.422 ; 25.474,1.422 cw(c25.484,1.323) 25.533,1.409 26.131,1.069 26.139,1.064 26.49,0.826 26.6,0.752 26.625,0.734 26.656,0.734 26.659,0.734 27.883,0.826 31.082,1.066 31.105,1.083 32.108,1.83 cw(c32.167,1.75) 32.16,1.85 32.208,1.853 33.273,1.927 ; 33.274,1.927 cw(c33.28,1.827) 33.285,1.927 36.261,1.768 38.274,2.204 cw(c38.295,2.106) 38.299,2.206 44.298,1.967 49.926,1.744 ; 49.927,1.744 52.897,1.585 cw(c52.892,1.485) 52.904,1.584 59.224,0.826 60.809,0.636 ; 60.81,0.636 64.013,0.214 cw(c64,0.114) 64.017,0.213 64.384,0.15 67.365,-0.36 67.378,-0.361 70.48,-0.464 ; 70.481,-0.464 75.686,-0.544 75.689,-0.544 81.259,-0.512 ; 81.259,-0.512 cw(c81.259,-0.612) 81.262,-0.512 85.868,-0.632 92.103,-0.799 98.503,-0.975 105.687,-1.202 105.688,-1.202 111.684,-1.44 116.381,-1.764 116.4,-1.774 116.881,-2.035 116.899,-2.045 ccw(c119.553,2.854) 117.814,-2.439 ccw(c117.845,-2.344) 117.849,-2.444 117.863,-2.443 ccw(c116.51,24.003) 119.096,-2.351 121.181,-2.351 cw(c121.208,-2.448) 121.201,-2.348 ccw(c121.098,-0.801) 122.037,-2.035 ccw(c121.098,-0.801) 122.218,-1.873 cw(c122.291,-1.942) 122.269,-1.844 ccw(c116.51,24.003) 122.909,-1.693 122.92,-1.69 ccw(c117.846,18.629) 123.26,-1.603 ccw(c121.924,3.388) 123.3,-1.592 ccw(c121.924,3.388) 123.704,-1.462 cw(c123.738,-1.556) 123.737,-1.456 126.335,-1.435 ccw(c126.333,-1.135) 126.342,-1.435 128.355,-1.385 cw(c128.357,-1.485) 128.36,-1.385 128.726,-1.39 128.752,-1.391 132.324,-1.448 132.327,-1.448 ccw(c132.333,-0.898) 132.349,-1.448 133.173,-1.424 v1(135.469,-2.084)
  Bottom Layer w0.1: J4.16@-214.697,-37.419 -214.637,-37.281 -214.559,-37.114 cw(c-214.468,-37.156) -214.47,-37.056 v1(-213.795,-37.039) ; v1(-171.997,-1.316) -171.625,-1.47 ccw(c-171.586,-1.378) -171.515,-1.448 -171.14,-1.069 cw(c-170.198,-2.001) -169.503,-0.873 ccw(c-169.451,-0.788) -169.428,-0.885 -167.653,-0.46 cw(c-167.63,-0.557) -167.634,-0.457 -167.627,-0.457 cw(c-167.608,-0.605) -167.622,-0.456 cw(c-167.608,-0.605) -167.618,-0.456 -166.471,-0.375 cw(c-166.461,-0.525) -166.336,-0.441 v1(-166.146,-0.723) ; v1(197.325,-16.573) 197.75,-16.163 J2.1@198.068,-15.844